# Altium PCB 8SoundsUSB.PcbDoc (part 3 of 3)
Units mm, origin at the board's own origin, x right, y up, seen from the top; angles counter-clockwise.
Board outline 126.1 x 74.1 mm, 4 copper layers (Top Layer, GND PLANE, POWER PLANE, Bottom Layer); 415 components, 227 nets, 1234 pads, 311 vias.
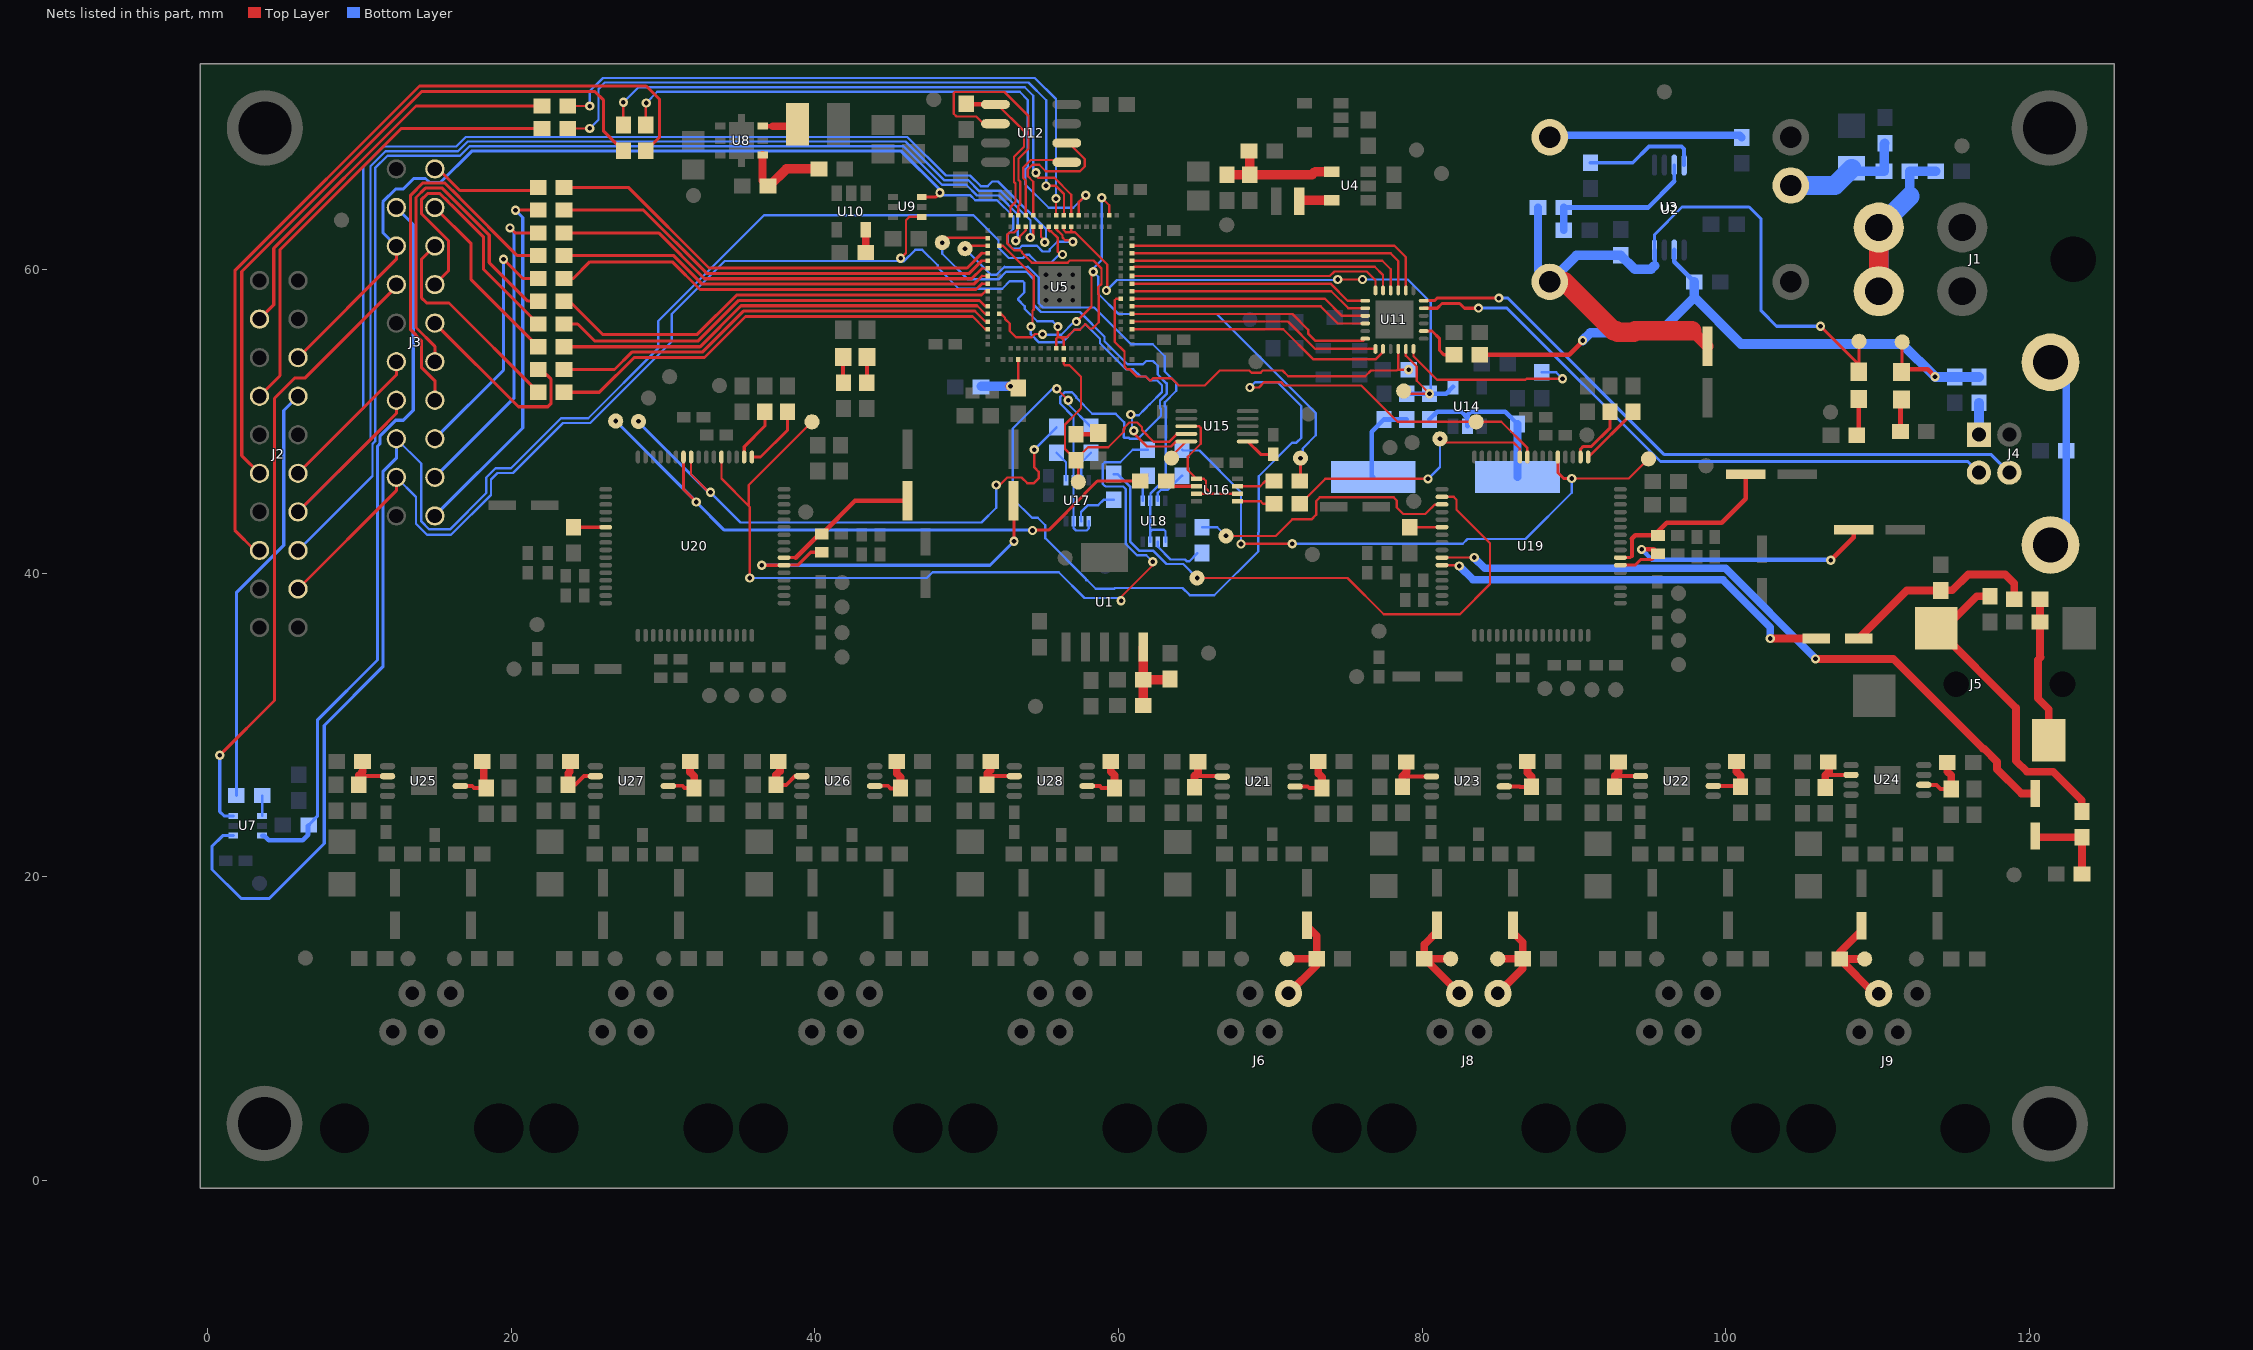
[diagram p5: the nets of this part, all layers, seen from the top]

## Via types
v1: diameter 0.61, hole 0.305, Top Layer to Bottom Layer, 227 vias
v2: diameter 0.406, hole 0.305, Top Layer to Bottom Layer, 32 vias
v3: diameter 1.27, hole 0.711, Top Layer to Bottom Layer, 27 vias
v4: diameter 1.016, hole 0.508, Top Layer to Bottom Layer, 20 vias
v5: diameter 0.66, hole 0.33, Top Layer to Bottom Layer, tented top, 4 vias
v6: diameter 0.61/0.61 (per signal layer), hole 0.305, Top Layer to Bottom Layer, 1 vias

## Nets (pads, with @x,y where several pads share a name; then routed paths per layer and width w, separated by ;. In a path a pad name is that pad's centre, name@x,y a point inside that pad or via, vN(x,y) a via of type N, cw(c..) or ccw(c..) an arc to the next point about the centre after c; other vN are vias at no path point) (continued)
NetC2_1: C2.1 R2.2 R3.1 U1.5 | length 5.6
  Top Layer w0.635: U1.5@61.63,35.143 61.63,33.003 R2.2@61.64,32.993 ; C2.1@61.64,31.293 R2.2@61.64,32.993 ; R3.1@63.39,33.043 63.34,32.993 R2.2@61.64,32.993
NetC5_2: C5.2 FB1.2 J1.1 J1.2 | length 14.9
  Top Layer w1.27: J1.2@110.09,62.793 J1.1@110.09,58.593 110.09,58.464 J1.1@110.134,58.42
  Bottom Layer w0.635: 112.14,64.843 FB1.2@112.14,66.493 C5.2@113.84,66.493
  Bottom Layer w1.27: J1.1@110.109,58.496 110.09,58.515 J1.1@110.09,58.593 J1.2@110.09,62.793 112.14,64.843
NetC6_2: C6.2 C7.2 FB1.1 U2.2 | length 8.7
  Bottom Layer w0.508: C7.2@108.29,66.693 C7.2@108.49,66.493 ; FB1.1@110.44,66.493 FB1.1@110.49,66.543
  Bottom Layer w0.635: C7.2@108.49,66.493 FB1.1@110.44,66.493 110.44,68.293 C6.2@110.49,68.343
  Bottom Layer w1.27: U2.2@104.29,65.559 107.19,65.559 C7.2@108.306,66.675
NetC11_1: C11.1 R10.2 R12.1 U4.4 | length 8.6
  Top Layer w0.635: C11.1@67.152,66.275 R10.2@68.652,66.275 ; R12.1@68.602,67.825 68.652,67.775 R10.2@68.652,66.275 ; U4.4@74.052,66.475 72.952,66.475 72.752,66.275 R10.2@68.652,66.275
NetC13_2: C13.2 R11.2 U5.A38 | length 4.7
  Top Layer w0.152: C13.2@53.39,52.343 U5.A38@53.39,54.093
  Top Layer w0.635: v1(52.883,52.324) 53.39,52.324 v1(52.883,52.324)
  Bottom Layer w0.635: R11.2@50.952,52.324 v1(52.883,52.324)
NetC27_2: C27.2 U10.5 | length 1.5
  Top Layer w0.508: C27.2@43.34,61.143 U10.5@43.34,62.643
NetC29_2: C29.2 J4.5 J4.6 | length 12.9
  Bottom Layer w0.508: J4.6@121.4,41.873 122.44,42.913 122.44,52.874 J4.5@121.4,53.913
NetC36_2: C36.2 U15.6 | length 2
  Top Layer w0.203: U15.6@68.515,48.693 69.365,47.843 C36.2@70.19,47.843
NetC37_2: C37.2 R44.2 U14.2 Y1.1 | length 10.8
  Bottom Layer w0.305: R44.2@80.49,50.143 80.99,50.643 82.601,50.643 82.99,50.254 ; U14.2@82.99,49.693 82.99,50.254 ; C37.2@86.29,49.843 85.49,50.643 83.21,50.643 82.99,50.423 82.99,50.254
  Bottom Layer w0.508: Y1.1@86.284,46.355 86.29,46.361 C37.2@86.29,49.843
NetC38_2: C38.2 R45.2 Y1.2 | length 8.9
  Bottom Layer w0.305: Y1.2@76.784,46.355 76.752,46.355 Y1.2@76.69,46.293 ; R45.2@78.99,50.143 C38.2@77.49,50.143 76.69,49.343 ; Y1.2@76.69,46.293 76.69,46.355 76.69,49.343 ; Y1.2@76.69,46.293 76.69,49.343
NetC57_1: C57.1 U19.26 | length 46.9
  Top Layer w0.152: U19.26@81.331,41.046 v1(83.439,41.046)
  Top Layer w0.508: v1(105.918,34.366) 111.049,34.366 116.964,28.451 117.03,28.451 117.881,27.6 117.881,27.102 119.479,25.505 C57.1@120.396,25.505
  Bottom Layer w0.508: v1(105.918,34.366) 105.918,34.411 99.994,40.335 84.125,40.335 ; 84.125,40.335 83.426,41.034 83.414,41.046 84.125,40.335
NetC57_2: C57.2 R52.1 R53.1 | length 5.5
  Top Layer w0.508: C57.2@120.396,22.705 120.481,22.62 R52.1@123.469,22.62 123.481,22.608 R53.1@123.481,20.193
NetC58_2: C58.2 J5.2 R52.2 | length 21.9
  Top Layer w0.508: J5.2@114.854,36.393 J5.2@114.447,36.393 ; C58.2@117.424,38.493 116.547,38.493 J5.2@114.447,36.393 ; R52.2@123.469,24.32 123.469,25.044 121.59,26.924 119.863,26.924 119.126,27.661 119.126,31.158 J5.2@113.89,36.393 J5.2@114.447,36.393
NetC59_1: C59.1 U19.27 | length 27.1
  Top Layer w0.152: U19.27@81.315,40.543 82.393,40.543 v1(82.448,40.488)
  Top Layer w0.508: v1(102.946,35.712) C59.1@105.966,35.712
  Bottom Layer w0.508: v1(82.448,40.488) 83.363,39.573 99.822,39.573 102.946,36.449 v1(102.946,35.712)
NetC59_2: C59.2 R54.1 R55.1 | length 13.3
  Top Layer w0.508: C59.2@108.766,35.712 111.929,38.876 R55.1@114.173,38.876 114.185,38.887 114.935,38.887 115.976,39.929 118.415,39.929 119.007,39.337 R54.1@119.007,38.293
NetC60_2: C60.2 J5.3 R54.2 | length 9.7
  Top Layer w0.508: R54.2@120.707,38.293 C60.2@120.707,36.793 120.707,34.512 120.752,34.468 120.574,34.29 120.574,31.775 121.29,31.059 J5.3@121.29,28.993
NetC63_2: C63.2 C65.1 U19.54 | length 19.4
  Top Layer w0.203: U19.54@93.061,40.538 U19.54@93.065,40.543 94.028,40.543 94.405,40.919 95.159,40.919 C63.2@95.54,41.301
  Top Layer w0.305: v1(94.463,41.58) 95.262,41.58 C63.2@95.54,41.301 ; v1(106.934,40.869) 108.434,42.369 C65.1@108.434,42.875
  Bottom Layer w0.305: v1(94.463,41.58) 95.148,40.894 106.909,40.894 v1(106.934,40.869)
NetC64_1: C64.1 C66.2 U19.55 | length 12.3
  Top Layer w0.203: U19.55@93.065,41.043 93.723,41.043 93.828,41.148
  Top Layer w0.254: 93.828,41.148 93.828,42.291
  Top Layer w0.305: 93.828,42.291 94.056,42.52 C66.2@95.522,42.52 ; C66.2@95.54,42.501 C66.2@95.522,42.52 ; C64.1@101.324,46.533 101.324,44.911 99.746,43.332 96.515,43.332 96.114,43.332 95.522,42.741 C66.2@95.522,42.52
NetC81_2: C81.2 C83.1 U20.54 | length 25.7
  Top Layer w0.203: U20.54@37.965,40.543 U20.54@37.978,40.543 ; U20.54@37.998,40.564 U20.54@37.978,40.543 ; C81.2@40.44,41.393 39.717,41.393 38.867,40.543 U20.54@37.978,40.543 ; C83.1@53.086,44.729 53.111,44.704 v1(53.111,42.113) ; U20.54@37.973,40.538 U20.54@37.978,40.543 ; U20.54@37.973,40.538 37.965,40.538 v1(36.5,40.538) U20.54@37.973,40.538
  Bottom Layer w0.203: v1(36.5,40.538) 51.537,40.538 v1(53.111,42.113)
NetC82_1: C82.1 C84.2 U20.55 | length 9.7
  Top Layer w0.203: U20.55@37.965,41.043 38.737,41.043 ; C84.2@40.287,42.593 C84.2@40.44,42.593
  Top Layer w0.305: 38.737,41.043 C84.2@40.287,42.593 ; C84.2@40.44,42.593 42.64,44.793 C82.1@46.09,44.793
NetC85_2: C85.2 R70.2 U21.2 | length 3.7
  Top Layer w0.254: U21.2@71.635,25.959 72.466,25.959 72.566,25.859 C85.2@73.41,25.859
  Top Layer w0.508: R70.2@73.16,27.609 73.152,27.601 73.152,26.822 73.41,26.564 C85.2@73.41,25.859
NetC86_2: C86.2 R71.2 U22.2 | length 3.6
  Top Layer w0.254: U22.2@99.191,25.997 100.924,25.997 C86.2@100.987,25.934
  Top Layer w0.508: R71.2@100.712,27.609 100.712,26.951 100.711,26.949 100.987,26.673 C86.2@100.987,25.934
NetC87_2: C87.2 R68.2 U21.6 | length 3.6
  Top Layer w0.254: 65.01,26.656 66.788,26.656 U21.6@66.835,26.609
  Top Layer w0.508: C87.2@65.01,25.909 65.01,26.656 65.232,26.878 R68.2@65.232,27.592
NetC88_2: C88.2 R69.2 U22.6 | length 3.5
  Top Layer w0.254: 92.688,26.647 U22.6@94.391,26.647
  Top Layer w0.508: C88.2@92.687,25.934 92.687,26.647 92.937,26.897 R69.2@92.937,27.584
NetC95_2: C95.2 J6.4 R82.2 TP68.1 | length 7.5
  Top Layer w0.508: TP68.1@71.11,14.609 R82.2@73.06,14.609 ; J6.4@71.2,12.333 73.06,14.193 R82.2@73.06,14.609 ; C95.2@72.41,16.809 72.39,16.789 73.06,16.118 R82.2@73.06,14.609
NetC97_2: C97.2 R86.2 U23.2 | length 3.6
  Top Layer w0.254: U23.2@85.454,25.96 86.435,25.96 ; 86.435,25.934 C97.2@87.211,25.934 ; U23.2@85.418,25.97 85.454,25.934 U23.2@85.418,25.97
  Top Layer w0.508: R86.2@86.936,27.609 86.944,27.601 86.944,26.873 87.211,26.606 C97.2@87.211,25.934
NetC98_2: C98.2 R87.2 U24.2 | length 3.8
  Top Layer w0.254: U24.2@113.062,26.07 113.071,26.06 113.894,26.06 114.159,25.795 C98.2@114.862,25.795
  Top Layer w0.508: R87.2@114.612,27.545 114.612,26.943 114.862,26.693 C98.2@114.862,25.795
NetC99_2: C99.2 R84.2 U23.6 | length 3.7
  Top Layer w0.254: 78.711,26.641 78.733,26.62 U23.6@80.618,26.62
  Top Layer w0.508: C99.2@78.711,25.934 78.711,26.641 78.969,26.899 78.969,27.577 R84.2@78.961,27.584
NetC100_2: C100.2 R85.2 U24.6 | length 3.5
  Top Layer w0.254: 106.562,26.679 106.603,26.72 U24.6@108.262,26.72
  Top Layer w0.508: C100.2@106.562,25.895 106.562,26.679 ; 106.603,26.72 106.807,26.924 106.807,27.543 R85.2@106.767,27.583
NetC101_2: C101.2 J8.2 R88.2 TP70.1 | length 7.6
  Top Layer w0.508: C101.2@80.986,16.809 80.986,16.395 80.136,15.545 R88.2@80.136,14.609 ; TP70.1@81.886,14.609 R88.2@80.184,14.609 ; J8.2@82.46,12.333 R88.2@80.184,14.609 ; R88.2@80.136,14.609 R88.2@80.184,14.609 ; R88.2@80.136,14.609 R88.2@80.184,14.609
NetC102_2: C102.2 J9.2 R90.2 TP71.1 | length 8
  Top Layer w0.508: C102.2@108.962,16.795 108.962,16.48 107.512,15.03 R90.2@107.512,14.595 ; TP71.1@109.162,14.595 R90.2@107.512,14.595 ; J9.2@110.084,12.319 109.788,12.319 R90.2@107.512,14.595
NetC107_2: C107.2 J8.4 R98.2 TP72.1 | length 7.1
  Top Layer w0.508: TP72.1@84.986,14.609 R98.2@86.636,14.609 ; J8.4@85,12.333 86.636,13.969 86.636,15.7 85.986,16.35 C107.2@85.986,16.809
NetC109_2: C109.2 R102.2 U25.2 | length 3.5
  Top Layer w0.254: U25.2@16.662,25.984 17.424,25.984 17.54,25.868 C109.2@18.34,25.868
  Top Layer w0.508: R102.2@18.175,27.545 18.175,26.033 C109.2@18.34,25.868
NetC110_2: C110.2 R103.2 U26.2 | length 3.6
  Top Layer w0.254: U26.2@43.957,26.01 44.806,26.01 44.983,25.832 45.604,25.832 C110.2@45.64,25.868
  Top Layer w0.508: R103.2@45.39,27.618 45.39,26.822 45.64,26.572 C110.2@45.64,25.868
NetC111_2: C111.2 R100.2 U25.6 | length 3.5
  Top Layer w0.254: 9.958,26.643 U25.6@11.84,26.643
  Top Layer w0.508: C111.2@9.94,26.068 9.94,26.679 10.211,26.949 R100.2@10.211,27.584
NetC112_2: C112.2 R101.2 U26.6 | length 3.6
  Top Layer w0.254: C112.2@37.44,26.068 38.108,26.068 38.683,26.643 U26.6@39.14,26.643
  Top Layer w0.508: C112.2@37.44,26.068 37.44,26.721 37.694,26.974 37.694,27.515 R101.2@37.59,27.618
NetC121_2: C121.2 R118.2 U27.2 | length 3.6
  Top Layer w0.254: U27.2@30.34,25.993 30.357,26.01 31.267,26.01 31.409,25.868 C121.2@32.04,25.868
  Top Layer w0.508: R118.2@31.801,27.584 31.775,27.559 31.775,26.899 32.04,26.634 C121.2@32.04,25.868
NetC122_2: C122.2 R119.2 U28.2 | length 3.7
  Top Layer w0.254: U28.2@57.94,25.993 57.949,25.984 58.776,25.984 58.892,25.868 C122.2@59.74,25.868
  Top Layer w0.508: R119.2@59.49,27.618 59.49,26.953 59.487,26.949 59.74,26.696 C122.2@59.74,25.868
NetC123_2: C123.2 R116.2 U27.6 | length 3.5
  Top Layer w0.254: U27.6@25.54,26.643 24.789,26.643 24.232,26.086 C123.2@23.8,26.086 ; C123.2@23.8,26.086 23.779,26.107 23.774,26.111 C123.2@23.8,26.086
  Top Layer w0.508: C123.2@23.74,26.068 23.74,26.814 23.851,26.924 R116.2@23.851,27.483
NetC124_2: C124.2 R117.2 U28.6 | length 3.5
  Top Layer w0.254: 51.359,26.822 51.538,26.643 U28.6@53.14,26.643
  Top Layer w0.508: C124.2@51.34,26.068 51.359,26.087 51.359,26.822 51.59,27.054 R117.2@51.59,27.618
NetD1_2: D1.2 R7.1 | length 2.5
  Top Layer w0.305: R7.1@111.52,49.352 D1.2@111.52,51.449
  Top Layer w0.508: D1.2@111.52,51.449 111.559,51.488 111.658,51.587 D1.2@111.52,51.449
NetD2_2: D2.2 R8.1 | length 2.6
  Top Layer w0.305: R8.1@108.689,49.151 R8.1@108.639,49.101 108.763,49.225 D2.2@108.763,51.486 D2.2@108.763,51.562
NetD3_2: D3.2 R38.2 | length 3.5
  Top Layer w0.254: R38.2@41.859,52.553 41.859,52.564 D3.2@41.859,54.254 R38.2@41.859,52.553 ; R38.2@41.859,52.553 41.866,52.546 41.91,52.502 R38.2@41.859,52.553
NetD4_2: D4.2 R39.2 | length 1.7
  Top Layer w0.254: R39.2@43.434,52.603 D4.2@43.434,54.254
NetD5_2: D5.2 R40.2 | length 1.6
  Top Layer w0.305: R40.2@57.199,49.161 D5.2@58.635,49.161 ; D5.2@58.635,49.161 58.698,49.223 58.699,49.225 D5.2@58.635,49.161
NetFB2_1: FB2.1 J4.1 | length 2.1
  Bottom Layer w0.635: J4.1@116.69,49.143 FB2.1@116.69,51.243
NetJ2_13: J2.13 R14.2 | length 28
  Bottom Layer w0.203: R14.2@1.88,25.369 1.88,38.733 5.004,41.857 5.004,50.734 J2.13@5.944,51.674
NetJ3_2: J3.2 R28.1 | length 24.2
  Top Layer w0.203: v1(20.269,63.932) 21.767,63.932 R28.1@21.77,63.935
  Bottom Layer w0.203: J3.2@14.961,43.79 20.752,49.581 20.752,63.449 v1(20.269,63.932)
NetJ3_4: J3.4 R29.1 | length 20.7
  Top Layer w0.203: v1(19.914,62.763) 20.242,62.435 R29.1@21.77,62.435
  Bottom Layer w0.203: J3.4@14.961,46.33 20.168,51.537 20.168,62.509 v1(19.914,62.763)
NetJ3_6: J3.6 R31.1 | length 16.5
  Top Layer w0.203: v1(19.482,60.706) 20.753,59.435 R31.1@21.77,59.435
  Bottom Layer w0.203: J3.6@14.961,48.87 19.482,53.391 v1(19.482,60.706)
NetJ3_8: J3.8 R30.1 | length 24.9
  Top Layer w0.203: J3.8@14.961,51.41 14.961,52.692 14.072,53.581 14.072,55.341 13.36,56.053 13.36,64.912 14.183,65.735 15.598,65.735 16.561,64.772 16.561,64.77 20.396,60.935 R30.1@21.77,60.935
NetJ3_10: J3.10 R32.1 | length 23.8
  Top Layer w0.203: J3.10@14.961,53.95 14.961,54.955 13.716,56.2 13.716,64.765 14.331,65.38 15.451,65.38 16.205,64.625 16.205,64.623 18.542,62.286 18.542,60.477 21.082,57.937 21.767,57.937 R32.1@21.77,57.935
NetJ3_12: J3.12 R35.1 | length 12.7
  Top Layer w0.203: J3.12@14.961,56.49 20.472,50.978 22.396,50.978 22.624,51.206 22.624,52.788 21.978,53.435 R35.1@21.77,53.435
NetJ3_14: J3.14 R33.1 | length 19.4
  Top Layer w0.203: J3.14@14.961,59.03 15.85,59.919 15.85,61.938 14.072,63.716 14.072,64.618 14.478,65.024 15.303,65.024 15.85,64.478 15.85,64.475 16.165,64.16 18.178,62.148 18.178,60.027 R33.1@21.77,56.435
NetJ3_16: J3.16 R36.1 | length 14.4
  Top Layer w0.203: J3.16@15.265,61.57 J3.16@14.961,61.57 14.072,60.681 14.072,58.166 14.427,57.81 15.894,57.81 R36.1@21.77,51.935
NetJ3_17: J3.17 R16.2 U7.6 | length 48.2
  Bottom Layer w0.203: R16.2@6.641,23.419 7.214,23.991 7.214,30.328 11.176,34.29 11.176,48.388 11.354,48.566 11.354,49.06 12.383,50.089 12.878,50.089 13.538,50.749 13.538,62.992 J3.17@12.421,64.11
  Bottom Layer w0.305: U7.6@3.58,22.719 3.722,22.719 4.013,22.428 6.248,22.428 6.604,22.784 6.604,23.382 R16.2@6.641,23.419
NetJ3_18: J3.18 R34.1 | length 12
  Top Layer w0.203: J3.18@14.961,64.11 17.348,61.722 17.348,59.356 R34.1@21.77,54.935
NetJ3_20: J3.20 R37.1 | length 7.5
  Top Layer w0.203: J3.20@14.961,66.65 15.187,66.65 16.609,65.227 21.562,65.227 R37.1@21.77,65.435
NetL1_1: L1.1 U4.5 | length 2.2
  Top Layer w0.635: L1.1@71.902,64.525 71.952,64.575 U4.5@74.052,64.575
NetL2_1: L2.1 U8.3 | length 2.7
  Top Layer w0.305: U8.3@36.552,69.466 37.234,69.466 37.236,69.469
  Top Layer w0.508: 37.236,69.469 L2.1@38.76,69.469 ; L2.1@38.885,69.466 L2.1@38.913,69.494 ; L2.1@38.76,69.469 38.871,69.579 38.913,69.621 L2.1@38.76,69.469
NetR1_1: R1.1 U2.4 | length 12.8
  Bottom Layer w0.508: U2.4@88.415,68.734 88.541,68.859 100.926,68.859 R1.1@101.067,68.719
NetR4_1: R4.1 R5.2 U3.3 | length 10.6
  Bottom Layer w0.203: 96.615,65.828 U3.3@96.615,66.909
  Bottom Layer w0.305: R4.1@89.34,64.109 94.896,64.109 96.615,65.828
  Bottom Layer w0.508: R5.2@89.34,62.609 R4.1@89.34,64.109
NetR6_2: R6.2 U3.4 | length 7.7
  Bottom Layer w0.254: R6.2@91.09,67.059 93.882,67.059 94.945,68.123 97.104,68.123 97.265,67.962 U3.4@97.265,66.909
NetR14_1: R14.1 U7.4 | length 1.3
  Bottom Layer w0.152: U7.4@3.58,24.019 R14.1@3.58,25.369
NetR15_2: R15.2 R18.1 U8.1 | length 6
  Top Layer w0.508: U8.1@36.552,67.566 36.552,65.866 R18.1@36.902,65.516
  Top Layer w0.635: R18.1@36.982,65.507 38.125,66.65 R15.2@40.273,66.65
NetR21_2: R21.2 U11.2 | length 3.1
  Top Layer w0.203: U11.2@80.106,55.968 80.656,55.968 81.156,55.468 81.156,54.683 81.432,54.407 R21.2@82.106,54.407
NetR22_1: R22.1 U11.24 | length 12.5
  Top Layer w0.152: U11.24@79.431,54.793 79.431,54.313 80.988,52.756 86.817,52.756 86.893,52.832 v1(89.256,52.832)
  Bottom Layer w0.152: R22.1@87.89,53.243 88.844,53.243 v1(89.256,52.832)
NetR41_2: R41.2 U16.7 | length 2.5
  Top Layer w0.152: U16.7@67.84,45.743 69.34,45.743 69.69,46.093 R41.2@70.24,46.093
NetR42_1: R42.1 TP22.1 U19.10 | length 19.3
  Top Layer w0.152: R42.1@71.94,44.593 R42.1@72.411,44.593 ; v1(80.391,46.228) 73.615,46.228 R42.1@72.411,45.024 ; U19.10@86.44,47.668 86.44,48.212 86.025,48.627 TP22.1@81.498,48.627 ; R42.1@72.411,44.593 R42.1@72.411,45.024 ; R42.1@72.411,44.593 R42.1@72.411,45.024 ; TP22.1@81.498,48.627 81.216,48.908 81.178,48.946 TP22.1@81.498,48.627
  Bottom Layer w0.152: v1(80.391,46.228) 81.178,47.015 v1(81.178,48.87)
NetR42_2: R42.2 U16.5 | length 2.5
  Top Layer w0.152: U16.5@67.84,44.743 67.852,44.755 69.367,44.755 69.529,44.593 R42.2@70.24,44.593
NetR43_1: R43.1 TP41.1 U20.10 | length 62.4
  Top Layer w0.203: U20.10@31.34,47.465 31.34,45.545 v1(32.182,44.704) ; v1(54.331,42.824) 54.356,42.85 55.397,42.85 57.782,45.234 57.782,45.266 58.609,46.093 R43.1@61.44,46.093
  Bottom Layer w0.203: v1(26.873,50.038) 32.182,44.729 v1(32.182,44.704) 34.036,42.85 ; v1(54.331,42.824) v1@54.356,42.85 ; 34.036,42.85 54.331,42.85 v1@54.356,42.85 ; 34.036,42.85 v1@54.356,42.85
NetR43_2: R43.2 U16.2 | length 2.1
  Top Layer w0.203: R43.2@63.14,46.093 63.49,45.743 U16.2@65.14,45.743
NetR46_1: R46.1 TP6.1 U19.9 | length 68.6
  Top Layer w0.152: v1(55.938,52.164) v1(56.693,51.41) ; v1(68.656,52.248) 69.248,52.248 69.604,52.603 70.697,52.603 70.926,52.375 75.997,52.375 78.384,49.987 TP6.1@83.566,49.987 85.217,49.987 86.94,48.264 U19.9@86.94,47.668
  Bottom Layer w0.152: v1(55.938,52.164) 55.651,52.164 53.035,49.548 53.035,44.924 54.297,43.663 54.678,43.663 55.169,43.172 55.169,42.326 57.861,39.633 57.861,39.548 57.947,39.548 58.506,38.989 59.726,38.989 59.777,39.04 64.22,39.04 64.703,38.557 66.31,38.557 69.215,41.462 69.215,42.697 69.24,42.723 69.24,46.406 71.45,48.616 71.722,48.616 72.034,48.928 72.034,51.028 70.459,52.603 69.012,52.603 v1(68.656,52.248) ; v1(56.693,51.41) 56.693,51.141 R46.1@58.19,49.643
NetR46_2: R46.2 U17.7 | length 2.1
  Bottom Layer w0.152: U17.7@57.54,46.143 57.54,47.293 R46.2@58.19,47.943
NetR47_1: R47.1 TP34.1 U20.9 | length 38.6
  Top Layer w0.152: U20.9@31.84,47.668 31.84,46.526 33.028,45.339 v1(33.122,45.339) ; v1(51.943,45.822) 52.171,45.822 52.671,46.322 53.609,46.322 53.983,45.949 54.425,45.949 54.737,46.261 54.737,46.703 54.458,46.982 v1(54.458,48.158)
  Bottom Layer w0.152: v1(33.122,45.339) 35.103,43.358 50.978,43.358 51.943,44.323 v1(51.943,45.822) ; v1(54.458,48.158) 55.917,49.618 R47.1@55.917,49.643
  Bottom Layer w0.203: v1(28.372,50.013) 28.372,49.959 32.992,45.339 v1(33.122,45.339)
NetR47_2: R47.2 U17.5 | length 2.1
  Bottom Layer w0.152: R47.2@55.917,47.943 56.54,47.32 U17.5@56.54,46.143
NetR48_1: R48.1 TP27.1 U19.18 | length 39.1
  Top Layer w0.152: v1(65.176,39.7) 75.082,39.7 77.47,37.313 82.499,37.313 84.48,39.294 84.48,41.986 82.271,44.196 82.271,44.856 82.084,45.043 U19.18@81.315,45.043
  Bottom Layer w0.152: R48.1@59.69,46.543 59.933,46.543 60.782,45.694 60.782,42.068 61.349,41.502 62.275,41.502 63.162,40.615 64.262,40.615 v1(65.176,39.7)
NetR48_2: R48.2 U17.2 | length 3.1
  Bottom Layer w0.152: U17.2@57.54,43.443 57.531,43.453 57.531,44.044 57.987,44.501 58.666,44.501 59.009,44.843 R48.2@59.69,44.843
NetR49_1: R49.1 TP2.1 U19.5 | length 40.3
  Top Layer w0.152: v1(68.072,41.935) 68.097,41.961 v1(71.45,41.961) ; v1(89.865,46.253) 93.624,46.253 TP2.1@94.92,47.549
  Top Layer w0.203: U19.5@88.94,47.668 88.951,47.658 88.951,46.634 89.332,46.253 v1(89.865,46.253)
  Bottom Layer w0.152: R49.1@64.19,48.143 64.24,48.093 65.329,48.093 68.072,45.35 v1(68.072,41.935) ; v1(71.45,41.961) 82.685,41.961 82.99,42.266 86.817,42.266 89.865,45.314 v1(89.865,46.253)
NetR49_2: R49.2 U18.7 | length 2.6
  Bottom Layer w0.152: U18.7@62.594,44.78 62.594,45.315 62.795,45.517 63.264,45.517 R49.2@64.19,46.443
NetR50_1: R50.1 TP32.1 U20.5 | length 60.2
  Top Layer w0.152: U20.5@33.84,47.668 33.84,46.246 35.636,44.45 ; v1(35.712,39.7) 35.712,44.374 35.636,44.45 ; TP32.1@39.802,49.987 35.636,45.822 35.636,44.45 ; v1(60.173,38.202) v1@60.046,38.329 ; v1(62.255,40.767) v1@62.255,40.538 ; v1@60.046,38.329 v1@62.255,40.538 ; v1@60.046,38.329 v1@62.255,40.538
  Bottom Layer w0.152: v1(35.712,39.7) 47.371,39.7 47.752,40.081 56.058,40.081 57.76,38.379 59.995,38.379 v1(60.173,38.202) ; R50.1@61.917,48.143 60.937,48.143 60.116,47.322 59.096,47.322 58.962,47.188 58.962,45.899 59.096,45.765 59.112,45.765 59.157,45.72 60.325,45.72 60.325,45.716 60.477,45.563 60.477,41.942 61.223,41.197 61.826,41.197 v1(62.255,40.767)
NetR50_2: R50.2 U18.5 | length 1.8
  Bottom Layer w0.152: U18.5@61.594,44.78 61.594,46.119 R50.2@61.917,46.443
NetR51_1: R51.1 TP25.1 U19.19 | length 18.6
  Top Layer w0.152: v1(67.081,42.469) 70.359,42.469 71.45,43.56 72.711,43.56 73.024,43.872 73.024,44.775 73.258,45.009 78.13,45.009 78.334,44.806 78.334,44.348 78.765,43.917 80.213,43.917 80.662,44.365 80.823,44.526 81.298,44.526 U19.19@81.315,44.543
  Bottom Layer w0.152: R51.1@65.507,43.039 66.511,43.039 v1(67.081,42.469)
NetR51_2: R51.2 U18.2 | length 3.6
  Bottom Layer w0.152: U18.2@62.594,42.08 62.594,41.757 63.431,40.919 64.388,40.919 64.515,40.792 64.655,40.792 R51.2@65.202,41.339
NetR56_1: R56.1 U19.22 | length 2.1
  Top Layer w0.152: R56.1@79.19,43.043 U19.22@81.315,43.043
NetR59_2: R59.2 U19.2 | length 4.1
  Top Layer w0.203: U19.2@90.44,47.668 90.44,48.184 90.626,48.37 91.168,48.37 92.39,49.592 R59.2@92.39,50.643
NetR60_2: R60.2 U19.1 | length 4.2
  Top Layer w0.203: U19.1@90.94,47.668 90.97,47.668 93.89,50.589 R60.2@93.89,50.643
NetR62_1: R62.1 U20.22 | length 2.1
  Top Layer w0.203: R62.1@24.09,43.043 U20.22@26.215,43.043
NetR63_1: R63.1 U20.1 | length 4.3
  Top Layer w0.203: U20.1@35.84,47.668 36.416,47.668 38.202,49.454 38.19,49.465 R63.1@38.19,50.643
NetR66_2: R66.2 U20.2 | length 3.5
  Top Layer w0.203: U20.2@35.34,47.668 35.34,48.345 36.703,49.708 36.703,50.631 R66.2@36.69,50.643
NetTP3_1: TP3.1 U5.A21 U18.1 U18.3 U18.6 | length 34.3
  Top Layer w0.152: v1(49.89,61.393) 50.09,61.593 U5.A21@51.39,61.593
  Bottom Layer w0.152: v1(49.89,61.393) 51.609,59.675 51.963,59.675 52.487,60.198 52.512,60.173 53.964,60.173 54.016,60.224 54.744,59.496 54.744,57.805 55.026,57.523 55.426,57.523 ; 55.429,57.525 55.431,57.523 58.403,57.523 60.832,55.093 62.255,55.093 63.04,54.308 63.04,53.309 63.805,52.545 63.805,52.028 63.043,51.266 63.043,51.019 63.109,50.953 63.109,46.116 62.814,45.822 62.669,45.822 62.103,45.255 62.103,44.79 U18.6@62.094,44.78 62.094,42.713 ; U18.3@62.094,42.08 62.094,42.713 ; U18.1@63.094,42.08 63.094,42.774 62.992,42.875 62.255,42.875 62.094,42.713
NetTP7_1: TP7.1 U5.A20 U17.1 U17.3 U17.6 | length 46.6
  Top Layer w0.152: v1(48.39,61.793) 48.719,62.122 51.362,62.122 U5.A20@51.39,62.093
  Bottom Layer w0.152: v1(48.39,61.793) 48.39,61.057 50.078,59.37 52.09,59.37 52.587,59.868 53.94,59.868 54.439,59.369 54.439,57.679 54.9,57.218 57.455,57.218 59.08,55.592 59.08,55.297 60.605,53.772 61.602,53.772 61.828,53.998 62.27,53.998 62.583,53.686 62.583,53.106 63.17,52.519 63.17,51.824 62.738,51.393 62.738,50.893 62.804,50.827 62.804,50.385 61.34,48.922 61.323,48.922 61.271,48.87 60.749,48.87 60.673,48.946 60.376,48.946 60.35,48.971 60.35,49.497 60.371,49.517 60.371,49.959 59.809,50.521 58.275,50.521 57.226,51.57 57.226,51.631 56.914,51.943 56.472,51.943 56.159,51.631 56.159,51.189 57.04,50.308 U17.6@57.04,46.143 U17.3@57.04,43.443 57.04,42.985 57.201,42.824 57.912,42.824 58.04,42.953 U17.1@58.04,43.443
NetU15_3: U15.3 U16.1 U16.3 U16.6 | length 9.3
  Top Layer w0.152: U15.3@64.465,49.693 65.313,49.693 65.419,49.587 65.419,48.547 64.563,47.691 64.563,46.82 U16.1@65.14,46.243 65.623,46.243 65.765,46.101 65.765,45.593 66.115,45.243 ; U16.3@65.14,45.243 66.115,45.243 ; U16.6@67.84,45.243 66.115,45.243
OSC_13M: R44.1 R45.1 TP43.1 U5.B6 U5.B7 U11.23 U14.4 | length 43.1
  Top Layer w0.152: U5.B7@56.39,62.843 56.39,62.625 56.531,62.484 56.794,62.484 ; U5.B6@56.89,62.843 56.89,62.58 56.794,62.484 ; v1(59.202,58.643) 59.258,58.699 59.258,60.352 57.126,62.484 56.794,62.484 ; v1(74.447,59.36) v1(76.073,59.36) ; TP43.1@78.791,52.019 78.967,51.843 v1(80.49,51.843) 79.647,52.687 79.647,53.635 78.941,54.341 78.931,54.332 U11.23@78.931,54.793
  Bottom Layer w0.152: v1@59.202,58.668 v1(59.202,58.643) 59.893,59.334 74.422,59.334 v1(74.447,59.36) ; v1(76.073,59.36) 79.057,59.36 80.581,57.836 80.581,51.934 v1(80.49,51.843)
  Bottom Layer w0.305: R45.1@78.99,51.843 v1(80.49,51.843) 81.59,51.843 U14.4@82.04,52.293
PLL_LOCK: R40.1 TP26.1 U5.A44 U15.4 | length 20.3
  Top Layer w0.152: U5.A44@56.39,54.093 56.39,53.792 56.468,53.715 56.769,53.715 57.531,52.953 57.531,50.876 57.328,50.673 ; R40.1@57.175,47.498 57.988,48.311 59.324,48.311 60.35,49.337 60.35,49.497 60.376,49.522 60.376,49.599 60.714,49.936 61.232,49.936 61.544,49.624 61.544,49.446 62.326,48.665 63.335,48.665 63.864,49.193 U15.4@64.465,49.193 ; R40.1@57.199,47.461 56.471,48.189 56.471,49.805 57.353,50.688 ; R40.1@57.377,47.537 R40.1@57.353,47.513 ; R40.1@57.353,47.513 57.353,47.461 TP26.1@57.353,46.025 R40.1@57.353,47.513
RESET_B: R23.1 U5.B48 U11.22 | length 26.5
  Top Layer w0.152: U5.B48@60.14,58.093 59.846,58.093 59.759,58.007 59.759,55.252 60.39,54.622 60.39,53.631 60.579,53.442 60.749,53.442 61.222,52.969 61.791,52.969 62.055,52.705 62.121,52.705 62.273,52.857 63.492,52.857 63.975,52.375 65.685,52.375 66.676,53.365 68.616,53.365 68.761,53.221 69.364,53.221 69.509,53.365 70.797,53.365 71.178,52.984 76.252,52.984 76.633,53.365 78.334,53.365 78.384,53.416 v1@78.963,53.416 ; 78.431,53.463 U11.22@78.431,54.793
  other v1: 79.113,53.414
RST_N: J2.15 J3.15 U5.B8 U9.6 | length 70.5
  Top Layer w0.152: U5.B8@55.89,62.843 55.89,62.694 56.312,62.272 56.312,62.128 56.49,61.951 56.82,61.951 56.947,61.824 56.947,61.798 v1(56.998,61.849)
  Top Layer w0.203: J2.15@5.944,54.214 12.421,60.691 J3.15@12.421,61.57 ; U9.6@47.04,64.793 47.953,64.793 v1(48.235,65.075) ; U5.B8@55.88,62.833 U5.B8@55.89,62.843
  Bottom Layer w0.152: v1(56.998,61.849) 55.965,61.849 55.474,61.358 55.474,61.247 55.441,61.214 54.999,61.214 54.618,61.595 53.663,61.595 53.459,61.392 53.017,61.392 52.705,61.704 52.705,62.349 53.061,62.705 53.061,63.525 51.993,64.592 50.556,64.592 50.226,64.922 ; 50.226,64.922 48.235,64.922 50.226,64.922
  Bottom Layer w0.203: J3.15@12.421,61.57 11.532,62.459 11.532,64.478 12.383,65.329 12.878,65.329 13.564,66.015 14.338,66.015 14.592,65.761 15.329,65.761 17.386,67.818 45.697,67.818 48.235,65.281 v1(48.235,65.075) v1@48.235,64.922
SYNC_OUT: TP28.1 U5.B16 U15.5 | length 30.7
  Top Layer w0.152: U5.B16@52.14,61.593 52.385,61.593 54.407,59.571 54.407,57.379 54.331,57.302 54.331,56.358 v1@54.233,56.26 ; v1@54.102,56.388 v1(54.229,56.261) ; v1(61.011,49.403) v1@60.884,49.276 ; TP28.1@63.49,47.593 63.49,47.718 U15.5@64.465,48.693 63.795,48.693 63.461,48.36 61.876,48.36 60.96,49.276 v1@60.884,49.276 ; v1(54.229,56.261) v1@54.231,56.259 ; v1(54.229,56.261) 54.232,56.261 v1@54.233,56.26 ; v1@54.231,56.259 54.234,56.259 v1@54.233,56.26 ; v1@54.231,56.259 v1@54.233,56.26 ; v1@54.231,56.259 v1@54.233,56.26 ; v1@60.884,49.276 60.909,49.251 v1@60.884,49.276
  Bottom Layer w0.152: v1@54.338,56.152 v1(54.229,56.261) 54.229,55.761 54.77,55.22 56.286,55.22 57.124,56.058 57.447,56.058 57.803,56.413 57.828,56.413 58.776,55.466 58.776,55.17 60.504,53.442 60.978,53.442 61.45,52.969 61.791,52.969 62.055,52.705 62.553,52.705 62.865,52.393 62.865,51.951 62.054,51.139 62.049,51.139 61.737,50.827 61.737,50.823 61.333,50.419 ; v1(60.808,50.47) v1@60.808,50.343 ; v1(61.011,49.403) v1@60.884,49.276 ; v1@60.808,50.343 v1@60.884,50.343 ; v1@60.808,50.343 v1@60.884,50.343 ; v1@60.884,49.276 60.909,49.251 v1@60.884,49.276 ; v1@60.884,49.276 60.884,49.403 v1@60.884,50.343 ; v1@60.884,49.276 v1@60.884,50.343 ; 61.333,50.419 60.808,50.419 61.333,50.419
TCK: J2.9 J3.9 U5.B10 | length 84.2
  Top Layer w0.152: U5.B10@54.89,62.843 54.89,62.178 v1@55.22,61.849 ; v1(55.143,61.824) v1@55.22,61.747 ; v1@55.194,61.976 55.143,61.925 55.194,61.874 v1@55.22,61.849 ; v1@55.22,61.747 55.22,61.824 v1@55.22,61.849 ; v1@55.22,61.747 v1@55.22,61.849
  Top Layer w0.203: J2.9@5.944,46.594 12.421,53.071 J3.9@12.421,53.95
  Bottom Layer w0.152: J2.9@5.944,46.594 10.237,50.888 10.237,66.777 11.583,68.123 16.362,68.123 16.997,68.758 46.087,68.758 48.627,66.218 50.223,66.218 50.935,65.507 51.377,65.507 51.689,65.819 52.059,65.819 53.973,63.906 54,63.906 55.22,62.686 ; v1(55.143,61.824) v1@55.22,61.747 ; v1@55.22,61.747 55.22,61.824 55.22,62.686 ; v1@55.22,61.747 55.22,62.686
TDI: J2.5 U5.B12 | length 75.1
  Top Layer w0.152: v1(53.238,61.925) 53.365,61.925 53.492,62.052 53.492,62.197 53.89,62.595 U5.B12@53.89,62.843
  Bottom Layer w0.152: J2.5@5.944,41.514 10.846,46.416 10.846,48.525 11.024,48.703 11.024,66.701 11.836,67.513 16.614,67.513 17.249,68.148 45.834,68.148 48.374,65.608 49.971,65.608 50.682,64.897 52.119,64.897 53.365,63.651 53.365,62.052 v1(53.238,61.925)
TDO: J3.5 U5.B9 U7.1 | length 105.4
  Top Layer w0.152: U5.B9@55.39,62.843 55.39,62.618 55.474,62.535 55.568,62.535 56.007,62.095 56.007,61.189 ; v1(56.312,61.011) v1@56.312,60.884 ; 56.007,61.189 56.248,60.947 v1@56.312,60.884 ; 56.007,61.189 v1@56.312,60.884
  Top Layer w0.203: U5.B9@55.39,62.843 U5.B9@55.397,62.836
  Bottom Layer w0.152: J3.5@12.421,48.87 14.072,47.219 14.072,43.421 14.592,42.901 15.951,42.901 18.349,45.298 18.349,46.314 18.959,46.924 19.975,46.924 23.266,50.216 25.07,50.216 29.668,54.814 29.668,56.617 36.652,63.602 50.444,63.602 52.095,61.95 52.095,61.452 52.765,60.782 53.712,60.782 53.915,60.985 54.116,60.985 54.64,60.461 54.892,60.461 54.9,60.469 55.558,60.469 56.015,60.926 56.27,60.926 56.312,60.884 v1(56.312,61.011)
  Bottom Layer w0.203: U7.1@1.68,22.719 0.977,22.719 0.279,22.022 0.279,20.498 2.184,18.593 4.064,18.593 7.671,22.2 7.671,29.982 11.532,33.842 11.532,46.698 12.421,47.587 J3.5@12.421,48.87
TDOC: J3.13 U7.3 | length 41
  Top Layer w0.203: v1(0.787,28.016) 4.394,31.623 4.394,51.537 5.74,52.883 6.426,52.883 12.421,58.877 J3.13@12.421,59.03
  Bottom Layer w0.203: v1(0.787,28.016) 0.787,24.308 1.076,24.019 U7.3@1.68,24.019
TMS: J2.7 J3.7 U5.B11 | length 83.2
  Top Layer w0.152: v1(54.178,62.128) 54.236,62.071 54.307,62.071 54.39,62.154 U5.B11@54.39,62.843
  Top Layer w0.203: J2.7@5.944,44.054 11.158,49.269 12.421,50.531 J3.7@12.421,51.41
  Bottom Layer w0.152: J2.7@5.944,44.054 10.719,48.829 10.719,66.827 10.898,67.006 11.709,67.818 16.488,67.818 17.123,68.453 45.96,68.453 48.5,65.913 50.097,65.913 50.808,65.202 52.246,65.202 53.847,63.601 53.874,63.601 54.204,63.271 54.204,62.154 v1(54.178,62.128)
TRST_N: J2.3 J3.3 U5.B13 U5.B35 U5.B36 U9.4 | length 92.1
  Top Layer w0.152: v1(45.644,60.757) 45.999,61.112 45.999,63.271 46.221,63.493 U9.4@47.04,63.493 ; U5.B13@53.39,62.843 53.39,62.72 53.133,62.462 52.818,62.462 52.68,62.324 52.68,61.73 53.119,61.29 53.525,61.29 53.645,61.171 53.645,61.12 54.287,60.477 56.66,60.477 56.794,60.612 58.354,60.612 58.877,60.089 58.877,59.073 58.668,58.864 58.668,58.422 58.699,58.391 58.699,56.54 58.293,56.134 58.108,56.134 57.828,56.413 57.803,56.413 57.447,56.058 57.081,56.058 56.573,55.55 56.21,55.55 ; U5.B35@55.89,54.843 55.89,55.459 55.981,55.55 ; v1(56.007,56.261) 56.007,55.576 55.981,55.55 ; 56.185,55.575 56.21,55.55 ; U5.B36@56.39,54.843 56.39,55.37 56.21,55.55 ; 55.981,55.55 56.21,55.55
  Top Layer w0.203: J2.3@5.944,38.974 12.421,45.451 J3.3@12.421,46.33
  Bottom Layer w0.152: J3.3@12.421,46.33 13.716,45.034 13.716,43.274 14.445,42.545 16.027,42.545 18.654,45.172 18.654,46.188 19.085,46.619 20.101,46.619 23.393,49.911 25.196,49.911 25.394,50.109 ; 25.395,50.109 30.571,55.285 30.571,57.089 34.061,60.579 v1@45.593,60.579 ; v1@45.87,60.579 46.606,61.316 47.069,61.316 48.086,60.299 48.086,60.149 49.474,58.761 52.342,58.761 52.84,59.258 53.688,59.258 53.797,59.149 53.797,58.504 53.383,58.09 53.383,58.039 53.829,57.593 53.829,57.427 54.648,56.608 55.66,56.608 v1(56.007,56.261)
  Bottom Layer w0.203: v1@45.593,60.579 45.644,60.579 45.87,60.579 v1@45.593,60.579 ; v1@45.593,60.579 45.593,60.757 v1@45.593,60.782 ; v1@45.593,60.579 v1@45.593,60.782 ; v1@45.593,60.782 45.606,60.795 45.644,60.833 v1@45.593,60.782
USB_D_N: J4.2 U11.5 | length 41.3
  Top Layer w0.203: U11.5@80.106,57.468 81.002,57.468 81.318,57.785 82.475,57.785 82.792,57.468 v1@83.688,57.468
  Bottom Layer w0.203: v1(83.718,57.48) 85.598,57.48 95.707,47.371 115.963,47.371 J4.2@116.69,46.643
USB_D_P: J4.3 U11.6 | length 43.4
  Top Layer w0.203: U11.6@80.106,57.968 80.823,57.968 80.995,58.141 v1(85.065,58.141)
  Bottom Layer w0.203: v1(85.065,58.141) 85.649,58.141 95.961,47.828 117.505,47.828 J4.3@118.69,46.643
VBUS: C9.2 C35.2 D1.1 FB2.2 R21.1 TP64.1 U3.6 | length 46
  Top Layer w0.203: D1.1@111.557,53.391 111.608,53.442 111.633,53.467 TP64.1@111.633,55.245 TP64.1@111.59,55.202
  Top Layer w0.305: R21.1@83.806,54.407 89.688,54.407 ; v1(90.576,55.347) v1@90.622,55.347 ; D1.1@111.608,53.442 113.309,53.442 v1(113.792,52.959) ; 89.688,54.407 90.602,55.321 v1@90.622,55.341 ; 89.688,54.407 v1@90.622,55.341 ; v1@90.622,55.341 v1@90.622,55.347 ; v1@90.622,55.341 v1@90.622,55.347
  Bottom Layer w0.305: U3.6@96.615,61.309 96.615,60.534 C9.2@97.94,59.209
  Bottom Layer w0.635: v1(90.576,55.347) 91.084,55.855 95.602,55.855 97.94,58.193 ; C9.2@97.94,59.209 97.94,58.193 ; FB2.2@116.69,52.943 C35.2@115.09,52.943 113.808,52.943 v1(113.792,52.959) 111.633,55.118 101.016,55.118 97.94,58.193
VEXT: C4.1 C8.2 D2.1 R4.2 TP65.1 U2.5 U3.8 | length 52.4
  Top Layer w0.203: v1@106.248,56.085 v1(106.248,56.286) 108.737,53.797 D2.1@108.737,53.34 ; TP65.1@108.79,55.293 D2.1@108.79,53.342 ; D2.1@108.79,53.342 108.748,53.3 108.737,53.289 D2.1@108.79,53.342
  Top Layer w0.762: 97.788,55.982 C4.1@98.806,54.964
  Top Layer w1.27: U2.5@88.415,59.209 89.381,59.209 92.608,55.982 92.792,55.982 92.885,55.889 93.958,55.889 94.051,55.982 97.788,55.982
  Bottom Layer w0.203: U3.8@95.326,61.298 U3.8@95.315,61.309 95.315,62.321 97.13,64.135 101.549,64.135 102.337,63.348 102.337,57.302 103.353,56.286 v1(106.248,56.286)
  Bottom Layer w0.305: 95.326,60.274 U3.8@95.326,61.298
  Bottom Layer w0.508: R4.2@87.64,64.109 87.64,59.984 U2.5@88.415,59.209
  Bottom Layer w0.635: U2.5@88.415,59.209 90.165,60.959 C8.2@93.09,60.959 94.004,60.046 95.098,60.046 95.326,60.274
X0D0: U5.A15 U12.2 | length 16.9
  Top Layer w0.152: U12.2@51.893,69.628 51.098,69.628 50.622,70.104 49.327,70.104 49.149,70.282 49.149,71.653 49.217,71.722 52.484,71.722 54.077,70.129 54.077,67.979 53.416,67.318 53.416,65.922 53.524,65.815 53.524,64.344 53.39,64.211 U5.A15@53.39,63.593
X0D1: R20.2 U5.A16 U12.1 | length 10.6
  Top Layer w0.152: U12.1@51.893,70.898 51.911,70.917 52.002,70.917 53.772,69.147 53.772,68.105 53.111,67.445 53.111,65.796 53.219,65.688 53.219,64.471 52.89,64.142 U5.A16@52.89,63.593
  Top Layer w0.305: R20.2@49.971,70.943 50.016,70.898 U12.1@51.893,70.898
X0D4: R24.2 U5.A7 | length 40.5
  Top Layer w0.152: R24.2@28.854,69.543 28.854,70.966 v1(28.88,70.991) ; U5.A7@57.39,63.593 57.39,64.477 v1(57.836,64.922)
  Bottom Layer w0.152: v1(28.88,70.991) 29.618,71.73 53.492,71.73 54.026,71.196 54.026,66.792 53.848,66.614 53.848,65.636 55.399,64.084 57.023,64.084 ; 57.023,64.084 57.848,64.91 57.887,64.948 57.023,64.084
X0D5: R25.2 U5.A8 | length 44.8
  Top Layer w0.152: R25.2@27.381,69.543 v1(27.381,71.045) ; v1(54.559,66.396) 54.384,66.396 v1@54.381,66.393 ; U5.A8@56.89,63.593 56.89,64.953 55.778,66.065 54.709,66.065 ; v1@54.381,66.393 54.469,66.306 54.709,66.065 ; v1@54.381,66.393 54.709,66.065
  Bottom Layer w0.152: v1@27.381,71.245 v1(27.381,71.045) ; v1@27.407,71.07 v1(27.381,71.045) ; v1(54.559,66.396) 54.384,66.396 v1@54.381,66.393 ; v1(27.381,71.045) 28.371,72.034 53.823,72.034 54.381,71.476 ; v1@54.381,66.393 54.381,66.396 54.381,71.476 ; v1@54.381,66.393 54.381,71.476
X0D6: R26.2 U5.A9 | length 48.6
  Top Layer w0.152: R26.2@23.722,69.317 v1(25.17,69.317) ; v1(55.22,65.532) 55.88,65.532 56.413,64.999 56.413,63.616 U5.A9@56.39,63.593
  Bottom Layer w0.152: v1(25.17,69.317) 25.742,69.889 25.742,71.921 26.159,72.339 54.074,72.339 55.243,71.171 ; 55.243,71.171 55.243,65.532 55.243,71.171
X0D7: R27.2 U5.A10 | length 42.1
  Top Layer w0.152: R27.2@23.722,70.79 v1(25.17,70.79) v1@25.271,70.891 ; v1@55.88,64.795 v1(55.88,64.694) 55.88,63.604 U5.A10@55.89,63.593
  Bottom Layer w0.152: v1@25.373,70.79 v1(25.17,70.79) 25.17,71.78 26.033,72.644 54.483,72.644 55.88,71.247 v1@55.88,64.795
X0D10: U5.A13 U12.6 | length 9.5
  Top Layer w0.152: U5.A13@54.39,63.593 54.39,65.81 54.026,66.175 54.026,66.617 54.338,66.929 54.78,66.929 55.212,66.497 57.455,66.497 57.771,66.814 57.771,67.307 56.72,68.358 U12.6@56.593,68.358
X0D11: U5.A14 U12.5 | length 6.4
  Top Layer w0.152: U5.A14@53.89,63.593 53.89,65.879 53.721,66.048 53.721,66.743 54.212,67.234 56.447,67.234 U12.5@56.593,67.088
X0D12: U5.A55 U11.20 | length 17.8
  Top Layer w0.152: U5.A55@60.89,56.093 70.856,56.093 72.847,54.102 76.94,54.102 77.431,54.593 U11.20@77.431,54.793
X0D13: U5.A57 U11.18 | length 16.3
  Top Layer w0.152: U5.A57@60.89,57.093 71.456,57.093 72.492,56.058 72.492,55.811 72.982,55.321 76.109,55.321 U11.18@76.256,55.468
X0D14: U5.A58 U11.16 | length 21.7
  Top Layer w0.152: 66.723,57.593 U5.A58@60.89,57.593 67.389,57.593 73.318,57.593 74.443,56.468 U11.16@76.256,56.468
X0D15: U5.A59 U11.15 | length 15.8
  Top Layer w0.152: U5.A59@60.89,58.093 60.894,58.09 73.609,58.09 74.731,56.968 U11.15@76.256,56.968
X0D16: U5.A60 U11.14 | length 15.8
  Top Layer w0.152: U5.A60@60.89,58.593 74.02,58.593 75.145,57.468 U11.14@76.256,57.468
X0D17: U5.A61 U11.13 | length 15.8
  Top Layer w0.152: U5.A61@60.89,59.093 66.089,59.093 73.96,59.093 75.085,57.968 U11.13@76.256,57.968
X0D18: U5.A63 U11.11 | length 17.8
  Top Layer w0.152: U5.A63@60.89,60.093 60.995,60.198 76.886,60.198 77.431,59.653 U11.11@77.431,58.643
X0D19: U5.A64 U11.10 | length 18.7
  Top Layer w0.152: U5.A64@60.89,60.593 77.38,60.593 77.931,60.042 U11.10@77.931,58.643
X0D20: U5.A65 U11.9 | length 19.7
  Top Layer w0.152: U5.A65@60.89,61.093 60.897,61.087 77.927,61.087 78.431,60.583 U11.9@78.431,58.643
X0D21: U5.A66 U11.8 | length 20.6
  Top Layer w0.152: U5.A66@60.89,61.593 78.183,61.593 78.931,60.845 U11.8@78.931,58.643
X0D22: U5.A56 U11.19 | length 16.8
  Top Layer w0.152: U5.A56@60.89,56.593 71.169,56.593 72.969,54.793 U11.19@76.931,54.793
X0D23: U5.A62 U11.12 | length 17.1
  Top Layer w0.152: U5.A62@60.89,59.593 60.895,59.588 73.922,59.588 74.226,59.893 76.352,59.893 76.931,59.314 U11.12@76.931,58.643
X1D13: R28.2 U5.A23 | length 30
  Top Layer w0.152: 50.999,60.593 U5.A23@51.39,60.593
  Top Layer w0.203: R28.2@23.495,63.932 28.707,63.932 32.873,59.766 50.172,59.766 50.999,60.593
X1D14: R29.2 U5.A24 | length 29.5
  Top Layer w0.152: 51.002,60.093 U5.A24@51.39,60.093
  Top Layer w0.203: R29.2@23.47,62.433 23.471,62.435 24.284,62.435 24.285,62.433 29.703,62.433 32.725,59.411 50.319,59.411 51.002,60.093
X1D15: R30.2 U5.A25 | length 28.9
  Top Layer w0.152: 51.005,59.593 U5.A25@51.39,59.593
  Top Layer w0.203: R30.2@23.47,60.935 24.079,60.935 30.699,60.935 32.578,59.055 50.467,59.055 51.005,59.593
X1D16: R31.2 U5.A26 | length 29.3
  Top Layer w0.152: 51.008,59.093 U5.A26@51.39,59.093
  Top Layer w0.203: R31.2@23.47,59.435 24.078,59.435 25.171,60.528 30.602,60.528 32.431,58.699 50.614,58.699 51.008,59.093
X1D17: R32.2 U5.A27 | length 30
  Top Layer w0.152: 50.982,58.344 51.231,58.593 U5.A27@51.39,58.593
  Top Layer w0.203: R32.2@23.47,57.935 23.828,57.935 26.035,55.728 32.223,55.728 34.839,58.344 50.982,58.344
X1D18: R33.2 U5.A29 | length 29.7
  Top Layer w0.152: 50.836,57.988 51.231,57.593 U5.A29@51.39,57.593
  Top Layer w0.203: R33.2@23.47,56.435 24.363,56.435 25.476,55.321 32.319,55.321 34.986,57.988 50.836,57.988
X1D19: R34.2 U5.A30 | length 29.3
  Top Layer w0.152: 50.689,57.633 51.228,57.093 U5.A30@51.39,57.093
  Top Layer w0.203: R34.2@23.47,54.935 32.435,54.935 35.133,57.633 50.689,57.633
X1D20: R35.2 U5.A31 | length 29.8
  Top Layer w0.152: 50.542,57.277 51.225,56.593 U5.A31@51.39,56.593
  Top Layer w0.203: R35.2@23.47,53.435 26.795,53.435 27.939,54.579 32.583,54.579 35.281,57.277 50.542,57.277
X1D21: R36.2 U5.A32 | length 30.3
  Top Layer w0.152: 50.394,56.921 51.223,56.093 U5.A32@51.39,56.093
  Top Layer w0.203: R36.2@23.47,51.935 25.798,51.935 28.087,54.223 32.73,54.223 35.428,56.921 50.394,56.921
X1D22: R37.2 U5.A22 | length 30.5
  Top Layer w0.152: 50.996,61.093 51.13,61.093 U5.A22@51.39,61.093
  Top Layer w0.203: R37.2@23.47,65.435 27.707,65.435 33.02,60.122 50.025,60.122 50.996,61.093
XCORE_MCLK: R41.1 TP23.1 U5.A3 U5.B25 | length 41.6
  Top Layer w0.152: U5.B25@52.14,57.093 52.264,57.093 52.519,56.838 52.519,56.769 52.832,56.456 52.832,55.977 53.246,55.563 54.285,55.563 54.501,55.778 ; v1(54.991,55.753) v1@55.016,55.778 ; v1(57.226,56.591) 58.217,57.582 58.217,59.741 v1(58.344,59.868) ; v1(58.903,64.745) 59.39,64.257 U5.A3@59.39,63.593 ; 54.501,55.778 54.991,55.778 v1@55.016,55.778 ; 54.501,55.778 v1@55.016,55.778
  Top Layer w0.203: R41.1@71.94,46.093 71.99,46.143 v1(71.99,47.593)
  Bottom Layer w0.152: v1(57.226,56.591) 57.092,56.591 56.228,55.728 v1@55.067,55.728 ; v1(58.903,64.745) 58.903,60.655 58.318,60.071 58.318,59.893 v1(58.344,59.868) 58.668,59.543 58.668,58.422 59.997,57.093 66.478,57.093 73,50.571 73,49.098 72.136,48.235 72.136,47.739 72.034,47.637 v1(71.99,47.593) ; v1@55.016,55.778 v1(54.991,55.753) 55.016,55.728 v1@55.067,55.728 ; v1@55.016,55.778 v1@55.067,55.728 ; v1@55.016,55.778 v1@55.067,55.728
XL0_IN0: J2.14 R26.1 | length 30.8
  Top Layer w0.203: J2.14@3.404,51.674 4.76,53.03 4.76,61.331 12.746,69.317 R26.1@22.022,69.317
XL0_IN1: J2.18 R27.1 | length 26.6
  Top Layer w0.203: J2.18@3.404,56.754 4.343,57.694 4.343,61.417 13.716,70.79 R27.1@22.022,70.79
XL0_OUT0: J2.10 R25.1 | length 46.7
  Top Layer w0.203: J2.10@3.404,46.594 2.235,47.762 2.235,59.893 14.097,71.755 25.502,71.755 26.06,71.196 26.06,69.164 R25.1@27.381,67.843 R25.1@27.381,67.779
XL0_OUT1: J2.6 R24.1 | length 56.4
  Top Layer w0.203: J2.6@3.404,41.514 3.114,41.514 1.778,42.85 1.778,59.939 13.95,72.111 28.88,72.111 29.769,71.222 29.769,68.758 R24.1@28.854,67.843
pads on no net: J1. J2.1 J2.2 J5. J5.10 J6. J7. J8. J9. J10. J11. J12. J13. U2.3 U3.1 U5.A4 U5.A5 U5.A6 U5.A11 U5.A12 U5.A28 U5.A43 U5.A45 U5.A46 U5.A54 U5.A67 U5.B2 U5.B3 U5.B17 U5.B20 U5.B21 U5.B22 U5.B23 U5.B27 U5.B30 U5.B31 U5.B38 U5.B39 U5.B40 U5.B41 U5.B44 U5.B45 U5.B46 U5.B47 U5.B49 U5.B50 U5.B51 U5.B52 U5.B53 U5.B54 U5.B55 U6.4 U6.5 U10.4 U11.1 U11.7 U13.4 U14.1 U19.11 U19.14 U19.15 U19.16 U19.20 U19.21 U19.25 U19.28 U19.29 U19.30 U19.31 U19.32 U19.33 U19.34 U19.35 U19.36 U19.37 U19.38 U19.39 U19.40 U19.41 U19.57 U19.58 U19.59 U19.60 U20.11 U20.14 U20.15 U20.16 U20.17 U20.18 U20.19 U20.20 U20.21 U20.25 U20.26 U20.27 U20.28 U20.29 U20.30 U20.31 U20.32 U20.33 U20.34 U20.35 U20.36 U20.37 U20.38 U20.39 U20.40 U20.41 U20.57 U20.58 U20.59 U20.60

## Polygon pours and split planes (outlines as drawn)
GND on Top Layer "Ground-Bottom" (solid, pour order 1001): 20.676,25.375 20.701,25.4 21.184,25.4 21.184,28.905 21.107,28.981 22.276,30.15 22.327,30.15 34.696,30.15 35.56,31.013 35.331,31.242 35.255,31.242 35.154,31.242 34.315,30.404 34.29,30.378 21.158,30.378 21.158,30.302 20.549,29.693 20.523,29.667 20.523,28.677 20.523,28.448 20.701,28.27 20.701,25.476 21.107,25.476
GND on Top Layer "Ground-TOP" (solid, remove dead copper, pour order 1000): 0,0 0,73.1 125.075,73.1 125.075,0.075 125.15,0
GND on Bottom Layer "Ground-TOP" (solid, remove dead copper, pour order 1001): 0,0 0,73.1 125.075,73.1 125.075,0 0,0
GND on GND PLANE (split plane): 125.08,0.004 0.001,0.004 0.001,73.083 125.08,73.083
+4V3 on POWER PLANE (split plane): 125.08,0.004 0.001,0.004 0.001,12.521 7.282,19.802 7.31,19.844 7.32,19.893 7.32,28.04 21.244,41.964 125.08,41.964
+3V3 on POWER PLANE (split plane): 125.08,42.223 21.19,42.223 21.141,42.213 21.099,42.185 7.099,28.185 7.071,28.143 7.061,28.093 7.061,19.947 0.001,12.887 0.001,73.083 125.08,73.083
+1V0 on POWER PLANE (split plane): 50.061,66.093 50.071,66.044 50.099,66.002 51.999,64.102 52.041,64.074 52.09,64.064 63.661,64.064 63.661,53.723 48.02,53.723 48.02,64.593 48.01,64.643 47.982,64.685 46.182,66.485 46.14,66.513 46.09,66.523 43.52,66.523 43.52,66.693 43.52,68.093 43.51,68.143 43.482,68.185 43.44,68.213 43.39,68.223 41.044,68.223 40.82,68.447 40.82,71.651 50.061,71.651

## Keep-outs
Keep-Out Layer:
  lines w0.254: -0.375,-0.325 125.375,-0.325 125.375,73.45 -0.375,73.45 -0.375,-0.325

## Other copper
POWER PLANE (plane layer: these items are gaps in the copper):
  lines w0.254: -0.11,12.593 7.19,19.893 7.19,28.093 21.19,42.093 125.59,42.093 ; 40.69,68.393 40.69,71.78 50.19,71.78 50.19,66.093 52.09,64.193 63.79,64.193 63.79,53.593 47.89,53.593 47.89,64.593 46.09,66.393 43.39,66.393 43.39,66.693 43.39,68.093 40.99,68.093 40.69,68.393

## Silkscreen, mask and mechanical layers (free items; w line width, h text height)
Top Overlay:
  text "XLINK" at 10.85,71.075 h1
  text "EXT PWR" at 107.75,67.025 h1
  text "7-36 VDC" at 107.725,65.6 h1
  text "XTAG2" at 0.95,64.475 h1
  text "+" at 112.1,60.375 h1 r90
  text "Gnd" at 113.975,60.05 h0.5 r90
Bottom Overlay:
  drawing of 3 lines, arcs and shapes, not listed
  text "8SoundsUSB" at 36.825,31.7 h1.8 r285
  text "8SoundsUSB Rev 2.0 2011" at 62.9,28.625 h1
  text "Released under Creative Common License" at 62.925,26.95 h1
  text "Attribution-ShareAlike 2.5 Canada" at 62.925,25.125 h1
  text "(CC BY-SA 2.5)" at 62.7,23.4 h1
  text "Info : http://sourceforge.net/projects/eightsoundsusb/" at 62.825,21.7 h1